# Altium PCB remote.PcbDoc (part 3 of 4)
Units mil, origin at the board's own origin, x right, y up, seen from the top; angles counter-clockwise.
Board outline 1653.54 x 3582.68 mil, 2 copper layers (Top Layer, Bottom Layer); 71 components, 53 nets, 248 pads, 250 vias.
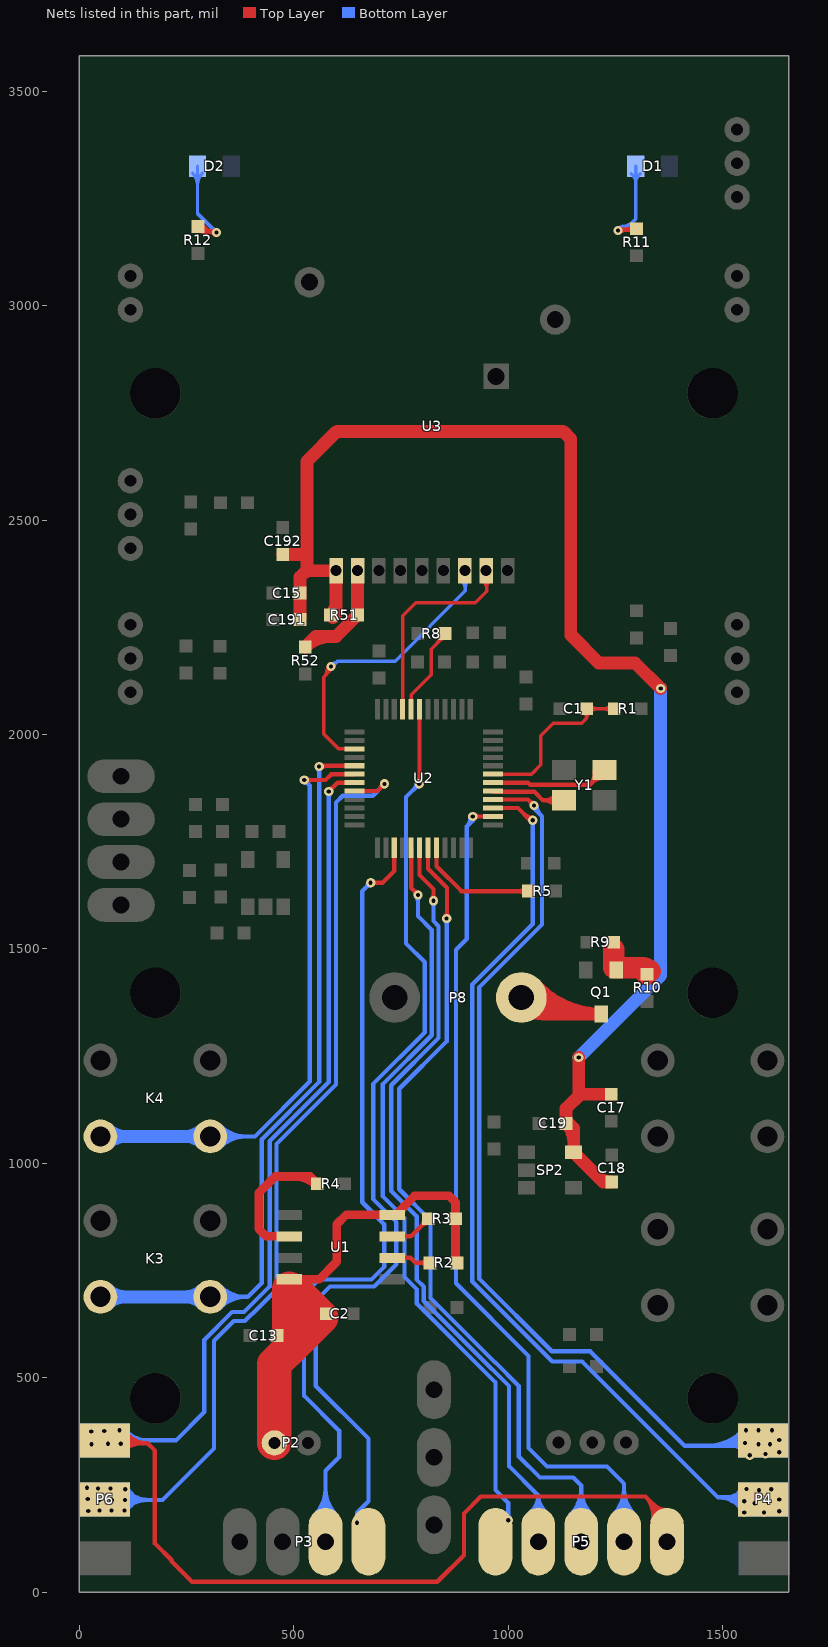
[diagram p3: the nets of this part, all layers, seen from the top]

## Via types
v1: diameter 21.65, hole 9.84, Top Layer to Bottom Layer, tented both sides, 241 vias
v2: diameter 21.65, hole 9.84, Top Layer to Bottom Layer, 9 vias

## Nets (pads, with @x,y where several pads share a name; then routed paths per layer and width w, separated by ;. In a path a pad name is that pad's centre, name@x,y a point inside that pad or via, vN(x,y) a via of type N, cw(c..) or ccw(c..) an arc to the next point about the centre after c; other vN are vias at no path point) (continued)
KEY-B1: P4.2 U2.3 | length 5449.9
  Top Layer w10: U2.3@964.57,1828.74 1022.64,1828.74 1051.18,1800.2 v1(1057.09,1800.2) ; 1037.06,1814.32 ccw(c1057.09,1834.35) 1057.09,1806.02 cw(c1057.09,1834.35) 1037.06,1814.32
  Bottom Layer w10: v1(1057.09,1800.2) 1057.09,1558.06 916.09,1417.06 916.09,724.76 1102.47,538.39 1172.24,538.39 1489.17,221.46 P4.2@1555.12,221.46 ; 1529.03,218.32 ccw(c1538.78,235.22) P4.2@1547.57,217.8 ; P4.2@1535.57,205.99 ccw(c1558.8,215.88) P4.2@1551.81,191.62 ; P4.2@1541.22,223.06 cw(c1560.71,214.68) P4.2@1556.32,235.44 ; P4.2@1542.71,235.51 ccw(c1542.71,242.13) P4.2@1549.31,241.61 ; P4.2@1547.6,225.2 ccw(c1538.99,233.55) P4.2@1549.85,238.66 ; P4.2@1553.99,208.17 cw(c1558.27,203.18) P4.2@1562.92,207.83 ; P4.2@1554.65,208.85 cw(c1560.36,204.05) P4.2@1564.33,210.35 ; v1(1555.12,241.14) P4.2@1569.88,241.14 ; P4.2@1558.53,236.42 cw(c1567.81,223.55) P4.2@1571.92,238.87 ; P4.2@1560.16,244.06 ccw(c1588.99,260.7) P4.2@1580.37,228.55 ; P4.2@1561.12,209.7 ccw(c1564.72,215.93) P4.2@1570.3,211.37 ; P4.2@1569.76,204.76 ccw(c1557.58,197.73) 1561.22,211.32 ccw(c1564.86,224.91) P4.2@1571.89,212.72 ; P4.2@1588.44,242.61 ccw(c1597.11,252.69) P4.2@1600.55,239.85 ; v1(1596.46,186.02) v1(1550.2,186.02) v1(1550.2,212.6) 1555.12,207.68 v1(1574.8,207.68) ; P4.2@1606.86,204.83 cw(c1608.17,191.15) P4.2@1620.08,198.02 ; P4.2@1611.68,234.53 cw(c1606.29,214.4) P4.2@1624.33,224.82 ; P4.2@1621.32,199.18 ccw(c1631.89,209.75) P4.2@1631.89,194.8 ; P4.2@1621.57,227.58 cw(c1610.53,216.55) P4.2@1626.14,216.55 ; P4.2@1622.2,198.3 cw(c1612.87,188.98) P4.2@1626.06,188.98 ; P4.2@1623.11,226.04 ccw(c1631.97,234.9) P4.2@1631.97,222.37 ; 1057.09,1786.13 cw(c1071.15,1786.13) 1061.21,1796.08 ccw(c1071.15,1786.13) 1057.09,1786.13 ; 1057.09,1786.13 ccw(c1043.02,1786.13) 1052.97,1796.08 cw(c1043.02,1786.13) 1057.09,1786.13 ; 1520.38,213.65 ccw(c1531.11,232.92) P4.2@1546.21,216.85 ; 1520.38,213.65 ccw(c1531.11,232.92) P4.2@1546.21,216.85 ; 1520.38,213.65 ccw(c1531.11,232.92) P4.2@1546.21,216.85 ; 1525.35,216.49 ccw(c1534.87,244.08) P4.2@1547.65,217.84 ; 1525.35,216.49 ccw(c1534.87,244.08) P4.2@1547.65,217.84 ; 1525.35,216.49 ccw(c1534.87,244.08) P4.2@1547.65,217.84 ; 1529.54,221.71 cw(c1531.49,208.53) P4.2@1544.5,211.36 ; 1529.54,221.71 cw(c1531.49,208.53) P4.2@1544.5,211.36 ; 1529.54,221.71 cw(c1531.49,208.53) P4.2@1544.5,211.36 ; 1531.5,207.08 cw(c1511.56,180.54) P4.2@1544.43,185.21 ; 1531.5,207.08 cw(c1511.56,180.54) P4.2@1544.43,185.21 ; 1531.5,207.08 cw(c1511.56,180.54) P4.2@1544.43,185.21 ; 1532.33,207 ccw(c1540.94,222.45) P4.2@1553.05,209.56 ; 1532.33,207 ccw(c1540.94,222.45) P4.2@1553.05,209.56 ; 1532.33,207 ccw(c1540.94,222.45) P4.2@1553.05,209.56 ; 1534.92,220.69 ccw(c1520.19,246.21) P4.2@1549.35,241.98 ; 1534.92,220.69 ccw(c1520.19,246.21) P4.2@1549.35,241.98 ; 1534.92,220.69 ccw(c1520.19,246.21) P4.2@1549.35,241.98 ; P4.2@1537.63,233.41 cw(c1548.16,215.18) P4.2@1553.61,235.51 ; P4.2@1537.63,233.41 cw(c1548.16,215.18) P4.2@1553.61,235.51 ; P4.2@1537.63,233.41 cw(c1548.16,215.18) P4.2@1553.61,235.51 ; P4.2@1540.14,223.27 cw(c1541.97,210.81) P4.2@1554.27,213.49 ; P4.2@1540.14,223.27 cw(c1541.97,210.81) P4.2@1554.27,213.49 ; P4.2@1540.14,223.27 cw(c1541.97,210.81) P4.2@1554.27,213.49 ; P4.2@1544.28,200.34 ccw(c1550.77,211.99) P4.2@1559.9,202.27 ; P4.2@1544.28,200.34 ccw(c1550.77,211.99) P4.2@1559.9,202.27 ; P4.2@1544.28,200.34 ccw(c1550.77,211.99) P4.2@1559.9,202.27 ; P4.2@1546.08,208.48 ccw(c1514.74,177.15) 1514.74,221.46 cw(c1514.74,177.15) P4.2@1546.08,208.48 ; P4.2@1546.08,208.48 cw(c1536.13,198.53) P4.2@1550.2,198.53 ; P4.2@1546.08,208.48 cw(c1536.13,198.53) P4.2@1550.2,198.53 ; P4.2@1546.25,211.24 cw(c1562.37,216.78) P4.2@1553.62,231.41 ; P4.2@1546.25,211.24 cw(c1562.37,216.78) P4.2@1553.62,231.41 ; P4.2@1546.25,211.24 cw(c1562.37,216.78) P4.2@1553.62,231.41 ; P4.2@1550.2,198.53 cw(c1564.26,198.53) 1554.32,208.48 ccw(c1564.26,198.53) P4.2@1550.2,198.53 ; P4.2@1550.2,200.09 cw(c1536.13,200.09) 1546.08,190.14 ccw(c1536.13,200.09) P4.2@1550.2,200.09 ; P4.2@1550.2,200.09 ccw(c1564.26,200.09) P4.2@1554.32,190.14 ; P4.2@1550.2,200.09 ccw(c1564.26,200.09) P4.2@1554.32,190.14 ; P4.2@1553.67,207.92 cw(c1558.3,201.66) P4.2@1563.08,207.81 ; P4.2@1553.67,207.92 cw(c1558.3,201.66) P4.2@1563.08,207.81 ; P4.2@1553.67,207.92 cw(c1558.3,201.66) P4.2@1563.08,207.81 ; P4.2@1554.32,190.14 ccw(c1564.26,200.09) P4.2@1564.26,186.02 ; P4.2@1554.32,190.14 ccw(c1564.26,200.09) P4.2@1564.26,186.02 ; P4.2@1555.21,209.63 ccw(c1561.59,205.86) P4.2@1556.47,200.5 ; P4.2@1555.21,209.63 ccw(c1561.59,205.86) P4.2@1556.47,200.5 ; P4.2@1555.21,209.63 ccw(c1561.59,205.86) P4.2@1556.47,200.5 ; P4.2@1555.24,215.51 ccw(c1573.42,226) P4.2@1567.98,205.74 ; P4.2@1555.24,215.51 ccw(c1573.42,226) P4.2@1567.98,205.74 ; P4.2@1555.24,215.51 ccw(c1573.42,226) P4.2@1567.98,205.74 ; P4.2@1559.24,237.02 cw(c1569.19,227.07) P4.2@1569.19,241.14 ; P4.2@1559.24,237.02 cw(c1569.19,227.07) P4.2@1569.19,241.14 ; P4.2@1559.24,237.02 cw(c1569.19,227.07) P4.2@1569.19,241.14 ; P4.2@1559.24,237.02 cw(c1569.19,227.07) P4.2@1569.19,241.14 ; P4.2@1559.24,237.02 cw(c1569.19,227.07) P4.2@1569.19,241.14 ; P4.2@1559.24,237.02 cw(c1569.19,227.07) P4.2@1569.19,241.14 ; P4.2@1559.24,245.26 ccw(c1569.19,255.21) P4.2@1569.19,241.14 ; P4.2@1559.24,245.26 ccw(c1569.19,255.21) P4.2@1569.19,241.14 ; P4.2@1559.24,245.26 ccw(c1569.19,255.21) P4.2@1569.19,241.14 ; P4.2@1559.24,245.26 ccw(c1569.19,255.21) P4.2@1569.19,241.14 ; P4.2@1559.24,245.26 ccw(c1569.19,255.21) P4.2@1569.19,241.14 ; P4.2@1559.24,245.26 ccw(c1569.19,255.21) P4.2@1569.19,241.14 ; P4.2@1560.74,207.68 cw(c1560.74,193.61) 1570.68,203.56 ccw(c1560.74,193.61) P4.2@1560.74,207.68 ; P4.2@1560.74,207.68 ccw(c1560.74,221.74) 1570.68,211.8 cw(c1560.74,221.74) P4.2@1560.74,207.68 ; P4.2@1564.26,186.02 ccw(c1564.26,171.96) 1554.32,181.9 cw(c1564.26,171.96) P4.2@1564.26,186.02 ; P4.2@1569.88,241.14 cw(c1569.88,230.17) P4.2@1579.53,235.41 ; P4.2@1569.88,241.14 cw(c1569.88,230.17) P4.2@1579.53,235.41 ; P4.2@1569.88,241.14 cw(c1569.88,230.17) P4.2@1579.53,235.41 ; P4.2@1569.88,241.14 cw(c1569.88,230.17) P4.2@1579.53,235.41 ; P4.2@1569.88,241.14 P4.2@1594.49,216.54 ; P4.2@1569.88,241.14 1581.69,241.14 v1(1584.65,238.19) 1611.22,238.19 v1(1613.19,240.16) 1631.97,221.38 v1(1631.97,216.55) 1631.97,189.06 v1(1631.89,188.98) 1627.95,188.98 v1(1606.3,210.63) 1603.35,207.68 v1(1574.8,207.68) ; v1(1574.8,207.68) cw(c1574.8,235.39) 1554.47,216.56 ccw(c1574.8,235.39) v1(1574.8,207.68) ; P4.2@1578.22,212.39 ccw(c1588.28,226.27) P4.2@1592.72,209.72 ; P4.2@1578.22,212.39 ccw(c1588.28,226.27) P4.2@1592.72,209.72 ; P4.2@1578.22,212.39 ccw(c1588.28,226.27) P4.2@1592.72,209.72 ; P4.2@1581.06,240.32 ccw(c1590.88,234.48) P4.2@1584.13,225.26 ; P4.2@1581.06,240.32 ccw(c1590.88,234.48) P4.2@1584.13,225.26 ; P4.2@1581.06,240.32 ccw(c1590.88,234.48) P4.2@1584.13,225.26 ; P4.2@1582.39,186.02 cw(c1582.39,171.96) 1592.34,181.9 ccw(c1582.39,171.96) P4.2@1582.39,186.02 ; P4.2@1582.39,186.02 ccw(c1582.39,200.09) 1592.34,190.14 cw(c1582.39,200.09) P4.2@1582.39,186.02 ; P4.2@1588.87,207.68 cw(c1588.87,221.74) 1578.92,211.8 ccw(c1588.87,221.74) P4.2@1588.87,207.68 ; P4.2@1588.87,207.68 ccw(c1588.87,193.61) 1578.92,203.56 cw(c1588.87,193.61) P4.2@1588.87,207.68 ; P4.2@1589.65,235.21 ccw(c1600.39,228.82) P4.2@1593,218.75 ; P4.2@1589.65,235.21 ccw(c1600.39,228.82) P4.2@1593,218.75 ; P4.2@1589.65,235.21 ccw(c1600.39,228.82) P4.2@1593,218.75 ; P4.2@1594.49,216.54 ccw(c1599.45,221.5) 1603.19,215.56 cw(c1599.45,221.5) P4.2@1594.49,216.54 ; P4.2@1594.49,216.54 cw(c1607.75,229.8) 1590.12,236.2 ccw(c1607.75,229.8) P4.2@1594.49,216.54 ; P4.2@1598.71,238.19 cw(c1598.71,252.26) 1588.77,242.31 ccw(c1598.71,252.26) P4.2@1598.71,238.19 ; P4.2@1598.71,238.19 ccw(c1598.71,224.12) 1588.77,234.07 cw(c1598.71,224.12) P4.2@1598.71,238.19 ; P4.2@1611.93,212.14 ccw(c1636.29,218.66) P4.2@1623.68,196.83 ; P4.2@1611.93,212.14 ccw(c1636.29,218.66) P4.2@1623.68,196.83 ; P4.2@1611.93,212.14 ccw(c1636.29,218.66) P4.2@1623.68,196.83 ; P4.2@1616.25,200.68 cw(c1626.19,210.63) 1612.13,210.63 ccw(c1626.19,210.63) P4.2@1616.25,200.68 ; P4.2@1616.25,200.68 ccw(c1606.3,190.74) 1606.3,204.8 cw(c1606.3,190.74) P4.2@1616.25,200.68 ; P4.2@1623.14,230.21 cw(c1633.08,240.16) 1619.02,240.16 ccw(c1633.08,240.16) P4.2@1623.14,230.21 ; P4.2@1623.14,230.21 ccw(c1613.19,220.26) 1613.19,234.33 cw(c1613.19,220.26) P4.2@1623.14,230.21 ; P4.2@1626.14,216.55 ccw(c1600.41,216.55) 1618.61,234.74 cw(c1600.41,216.55) P4.2@1626.14,216.55 ; P4.2@1631.89,194.8 cw(c1631.89,218.38) 1615.22,201.71 ccw(c1631.89,218.38) P4.2@1631.89,194.8 ; P4.2@1631.97,202.48 cw(c1646.04,202.48) 1636.09,212.43 ccw(c1646.04,202.48) P4.2@1631.97,202.48 ; P4.2@1631.97,202.48 ccw(c1617.9,202.48) 1627.85,212.43 cw(c1617.9,202.48) P4.2@1631.97,202.48 ; 1489.18,221.46 cw(c1489.18,142.88) 1548.75,194.12 ccw(c1489.18,142.88) 1489.18,221.46 ; 1503.71,221.46 ccw(c1503.71,287.63) 1550.5,240.84 cw(c1503.71,287.63) 1503.71,221.46 ; 1510.97,221.46 cw(c1510.97,161.63) 1556.33,200.64 ccw(c1510.97,161.63) 1510.97,221.46 ; 1527.85,221.46 ccw(c1527.85,263.49) 1557.57,233.77 cw(c1527.85,263.49) 1527.85,221.46 ; 1532.76,221.46 cw(c1532.76,180.37) 1563.91,207.16 ccw(c1532.76,180.37) 1532.76,221.46 ; P4.2@1538.89,221.46 cw(c1538.89,201.29) 1553.15,215.55 ccw(c1538.89,201.29) P4.2@1538.89,221.46 ; P4.2@1555.12,235.31 cw(c1555.12,185.6) 1590.27,220.75 ccw(c1555.12,185.6) P4.2@1555.12,235.31 ; P4.2@1555.12,245.31 cw(c1555.12,219.74) 1573.2,237.83 ccw(c1555.12,219.74) P4.2@1555.12,245.31 ; P4.2@1563.45,241.14 cw(c1563.45,216.99) 1580.53,234.07 ccw(c1563.45,216.99) P4.2@1563.45,241.14 ; P4.2@1585.1,207.68 ccw(c1585.1,231.83) 1602.18,214.75 cw(c1585.1,231.83) P4.2@1585.1,207.68 ; P4.2@1586.27,224.75 ccw(c1606.3,244.78) 1606.3,216.46 cw(c1606.3,244.78) P4.2@1586.27,224.75 ; P4.2@1594.37,238.19 ccw(c1594.37,258.98) 1609.07,244.28 cw(c1594.37,258.98) P4.2@1594.37,238.19 ; P4.2@1627.77,193.1 ccw(c1617.63,203.24) 1631.97,203.24 cw(c1617.63,203.24) P4.2@1627.77,193.1 ; P4.2@1631.97,202.85 ccw(c1645.76,202.85) 1636.01,193.1 cw(c1645.76,202.85) P4.2@1631.97,202.85
KEY-B2: P4.3 U2.4 | length 5111
  Top Layer w10: U2.4@964.57,1848.43 1046.26,1848.43 v1(1060.04,1834.65) ; 1050.09,1844.59 cw(c1040.15,1834.65) 1054.21,1834.65 ccw(c1040.15,1834.65) 1050.09,1844.59 ; 1050.09,1844.59 ccw(c1060.04,1854.54) 1060.04,1840.47 cw(c1060.04,1854.54) 1050.09,1844.59
  Bottom Layer w10: v1(1060.04,1834.65) 1060.04,1828.11 1078.91,1809.24 1078.91,1557.26 932.09,1410.43 932.09,731.39 1101.47,562.01 1190.94,562.01 1411.42,341.54 1545.28,341.54 v1(1552.17,348.43) P4.3@1555.12,345.47 ; 1534.01,344.44 cw(c1540.81,332.66) P4.3@1548.76,343.7 ; P4.3@1537.88,356.68 cw(c1564.83,343.98) P4.3@1555.88,372.39 ; P4.3@1537.96,343.73 cw(c1543.33,337.42) P4.3@1548.52,343.88 ; P4.3@1551.31,342.66 cw(c1549.5,330.39) P4.3@1560.25,336.59 ; P4.3@1557.79,346.92 ccw(c1567.82,344.23) P4.3@1558.83,339.04 ; v1(1562.99,319.88) 1596.46,319.88 v1(1599.41,322.83) P4.3@1577.76,322.83 ; P4.3@1594.49,354.33 1577.76,354.33 v1(1554.13,377.95) v1(1583.66,377.95) v1(1615.16,377.95) P4.3@1631.97,361.14 ; P4.3@1613.65,372.32 cw(c1609.12,355.41) P4.3@1624.28,364.16 ; P4.3@1616.06,345.47 ccw(c1632.39,345.47) P4.3@1620.85,333.92 ; P4.3@1618.58,336.19 ccw(c1610.24,327.84) P4.3@1610.24,339.65 ; P4.3@1618.95,338.09 ccw(c1628.9,343.83) P4.3@1630.94,332.52 ; P4.3@1620.79,376.44 ccw(c1631.04,373.7) P4.3@1621.85,368.39 ; P4.3@1621.21,367.24 cw(c1609.31,355.33) P4.3@1626.14,355.33 ; P4.3@1623.98,364.47 ccw(c1631.97,372.46) P4.3@1631.97,361.16 ; 1524.45,350.58 cw(c1532.47,333.45) P4.3@1547.53,344.9 ; 1524.45,350.58 cw(c1532.47,333.45) P4.3@1547.53,344.9 ; 1524.45,350.58 cw(c1532.47,333.45) P4.3@1547.53,344.9 ; 1525.38,345.67 cw(c1534.52,315.47) P4.3@1549.42,343.29 ; 1525.38,345.67 cw(c1534.52,315.47) P4.3@1549.42,343.29 ; 1525.38,345.67 cw(c1534.52,315.47) P4.3@1549.42,343.29 ; 1530.9,341.08 ccw(c1526.28,366.29) P4.3@1547.37,351.73 ; 1530.9,341.08 ccw(c1526.28,366.29) P4.3@1547.37,351.73 ; 1530.9,341.08 ccw(c1526.28,366.29) P4.3@1547.37,351.73 ; 1532.39,354.09 ccw(c1510.34,385.87) P4.3@1548.4,378.99 ; 1532.39,354.09 ccw(c1510.34,385.87) P4.3@1548.4,378.99 ; 1532.39,354.09 ccw(c1510.34,385.87) P4.3@1548.4,378.99 ; P4.3@1535.67,355.83 cw(c1542.56,341.12) P4.3@1555.49,350.95 ; P4.3@1535.67,355.83 cw(c1542.56,341.12) P4.3@1555.49,350.95 ; P4.3@1535.67,355.83 cw(c1542.56,341.12) P4.3@1555.49,350.95 ; P4.3@1535.92,368.06 cw(c1549.57,349.25) P4.3@1553.22,372.2 ; P4.3@1535.92,368.06 cw(c1549.57,349.25) P4.3@1553.22,372.2 ; P4.3@1535.92,368.06 cw(c1549.57,349.25) P4.3@1553.22,372.2 ; P4.3@1548.76,346.01 cw(c1561.17,354.83) P4.3@1551.51,366.59 ; P4.3@1548.76,346.01 cw(c1561.17,354.83) P4.3@1551.51,366.59 ; P4.3@1548.76,346.01 cw(c1561.17,354.83) P4.3@1551.51,366.59 ; P4.3@1553.69,354.05 ccw(c1559.18,374.26) P4.3@1570.56,356.67 ; P4.3@1553.69,354.05 ccw(c1559.18,374.26) P4.3@1570.56,356.67 ; P4.3@1553.69,354.05 ccw(c1559.18,374.26) P4.3@1570.56,356.67 ; P4.3@1555.12,345.47 cw(c1541.96,332.32) 1557.98,322.85 ccw(c1541.96,332.32) P4.3@1555.12,345.47 ; P4.3@1555.12,345.47 v1(1583.66,345.47) v1(1610.24,345.47) 1613.28,345.47 v1(1631.97,326.79) v1(1631.97,355.33) P4.3@1631.97,361.14 ; P4.3@1555.12,345.47 P4.3@1577.76,322.83 ; P4.3@1556.91,351.8 cw(c1569.92,361.05) P4.3@1559.8,373.39 ; P4.3@1556.91,351.8 cw(c1569.92,361.05) P4.3@1559.8,373.39 ; P4.3@1556.91,351.8 cw(c1569.92,361.05) P4.3@1559.8,373.39 ; P4.3@1557.99,348.68 cw(c1577.93,349.55) P4.3@1565.54,365.2 ; P4.3@1557.99,348.68 cw(c1577.93,349.55) P4.3@1565.54,365.2 ; P4.3@1557.99,348.68 cw(c1577.93,349.55) P4.3@1565.54,365.2 ; P4.3@1562.11,338.48 cw(c1572.06,348.43) 1557.99,348.43 ccw(c1572.06,348.43) P4.3@1562.11,338.48 ; P4.3@1562.11,338.48 ccw(c1552.17,328.53) 1552.17,342.6 cw(c1552.17,328.53) P4.3@1562.11,338.48 ; P4.3@1564.08,368.01 cw(c1574.03,377.95) 1559.96,377.95 ccw(c1574.03,377.95) P4.3@1564.08,368.01 ; P4.3@1564.08,368.01 ccw(c1554.13,358.06) 1554.13,372.13 cw(c1554.13,358.06) P4.3@1564.08,368.01 ; P4.3@1565.75,347.51 ccw(c1570.18,364.07) P4.3@1580.24,350.19 ; P4.3@1565.75,347.51 ccw(c1570.18,364.07) P4.3@1580.24,350.19 ; P4.3@1565.75,347.51 ccw(c1570.18,364.07) P4.3@1580.24,350.19 ; P4.3@1567.11,315.76 cw(c1577.06,305.81) P4.3@1577.06,319.88 ; P4.3@1567.11,315.76 cw(c1584.19,298.69) 1584.19,322.83 ccw(c1584.19,298.69) P4.3@1567.11,315.76 ; P4.3@1567.11,315.76 cw(c1577.06,305.81) P4.3@1577.06,319.88 ; P4.3@1568.2,377.95 cw(c1568.2,392.02) 1558.25,382.07 ccw(c1568.2,392.02) P4.3@1568.2,377.95 ; P4.3@1568.2,377.95 ccw(c1568.2,363.89) 1558.25,373.83 cw(c1568.2,363.89) P4.3@1568.2,377.95 ; P4.3@1569.59,345.47 cw(c1569.59,331.41) 1579.54,341.35 ccw(c1569.59,331.41) P4.3@1569.59,345.47 ; P4.3@1569.59,345.47 ccw(c1569.59,359.54) 1579.54,349.59 cw(c1569.59,359.54) P4.3@1569.59,345.47 ; P4.3@1569.59,377.95 cw(c1569.59,363.89) 1579.54,373.83 ccw(c1569.59,363.89) P4.3@1569.59,377.95 ; P4.3@1569.59,377.95 ccw(c1569.59,392.02) 1579.54,382.07 cw(c1569.59,392.02) P4.3@1569.59,377.95 ; P4.3@1577.06,319.88 cw(c1577.06,333.95) 1567.11,324 ccw(c1577.06,333.95) P4.3@1577.06,319.88 ; P4.3@1577.76,322.83 ccw(c1577.76,311.86) 1568.11,317.1 cw(c1577.76,311.86) P4.3@1577.76,322.83 ; P4.3@1585.34,322.83 cw(c1585.34,308.77) 1595.29,318.71 ccw(c1585.34,308.77) P4.3@1585.34,322.83 ; P4.3@1585.34,322.83 ccw(c1585.34,336.9) P4.3@1595.29,326.95 ; P4.3@1585.34,322.83 ccw(c1585.34,336.9) P4.3@1595.29,326.95 ; P4.3@1595.29,326.95 cw(c1578.21,344.03) 1578.21,319.88 ccw(c1578.21,344.03) P4.3@1595.29,326.95 ; P4.3@1596.17,345.47 cw(c1596.17,331.41) 1606.12,341.35 ccw(c1596.17,331.41) P4.3@1596.17,345.47 ; P4.3@1596.17,345.47 ccw(c1596.17,359.54) 1606.12,349.59 cw(c1596.17,359.54) P4.3@1596.17,345.47 ; P4.3@1597.73,345.47 cw(c1597.73,359.54) 1587.78,349.59 ccw(c1597.73,359.54) P4.3@1597.73,345.47 ; P4.3@1597.73,345.47 ccw(c1597.73,331.41) 1587.78,341.35 cw(c1597.73,331.41) P4.3@1597.73,345.47 ; P4.3@1597.73,377.95 cw(c1597.73,392.02) 1587.78,382.07 ccw(c1597.73,392.02) P4.3@1597.73,377.95 ; P4.3@1597.73,377.95 ccw(c1597.73,363.89) 1587.78,373.83 cw(c1597.73,363.89) P4.3@1597.73,377.95 ; P4.3@1601.09,377.95 cw(c1601.09,363.89) 1611.04,373.83 ccw(c1601.09,363.89) P4.3@1601.09,377.95 ; P4.3@1601.09,377.95 ccw(c1601.09,392.02) 1611.04,382.07 cw(c1601.09,392.02) P4.3@1601.09,377.95 ; P4.3@1610.24,339.65 cw(c1610.24,318.22) 1625.39,333.37 ccw(c1610.24,318.22) P4.3@1610.24,339.65 ; P4.3@1615.95,338.82 cw(c1604.81,319.51) P4.3@1626.34,325.28 ; P4.3@1615.95,338.82 cw(c1604.81,319.51) P4.3@1626.34,325.28 ; P4.3@1615.95,338.82 cw(c1604.81,319.51) P4.3@1626.34,325.28 ; P4.3@1622.02,336.73 cw(c1612.08,326.79) 1626.14,326.79 ccw(c1612.08,326.79) P4.3@1622.02,336.73 ; P4.3@1622.02,336.73 ccw(c1631.97,346.68) 1631.97,332.61 cw(c1631.97,346.68) P4.3@1622.02,336.73 ; P4.3@1625.1,368.01 cw(c1635.05,377.95) 1620.98,377.95 ccw(c1635.05,377.95) P4.3@1625.1,368.01 ; P4.3@1625.1,368.01 ccw(c1615.16,358.06) 1615.16,372.13 cw(c1615.16,358.06) P4.3@1625.1,368.01 ; P4.3@1626.14,355.33 ccw(c1598.05,355.33) 1617.92,375.2 cw(c1598.05,355.33) P4.3@1626.14,355.33 ; P4.3@1631.97,340.85 cw(c1617.9,340.85) 1627.85,330.91 ccw(c1617.9,340.85) P4.3@1631.97,340.85 ; P4.3@1631.97,340.85 ccw(c1646.04,340.85) 1636.09,330.91 cw(c1646.04,340.85) P4.3@1631.97,340.85 ; P4.3@1631.97,341.27 cw(c1646.04,341.27) 1636.09,351.21 ccw(c1646.04,341.27) P4.3@1631.97,341.27 ; P4.3@1631.97,341.27 ccw(c1617.9,341.27) 1627.85,351.21 cw(c1617.9,341.27) P4.3@1631.97,341.27 ; v1@1065.87,1834.65 ccw(c1095.71,1834.65) 1074.61,1813.54 cw(c1095.71,1834.65) v1@1065.87,1834.65 ; 1460.94,341.54 ccw(c1460.94,468.2) 1550.5,378.63 cw(c1460.94,468.2) 1460.94,341.54 ; 1485.08,341.54 ccw(c1485.08,444.06) 1557.57,371.56 cw(c1485.08,444.06) 1485.08,341.54 ; 1509.22,341.54 ccw(c1509.22,419.91) 1564.64,364.49 cw(c1509.22,419.91) 1509.22,341.54 ; 1521.47,341.54 ccw(c1521.47,379.13) 1548.05,352.55 cw(c1521.47,379.13) 1521.47,341.54 ; 1522.72,341.54 cw(c1522.72,302.24) 1550.5,330.03 ccw(c1522.72,302.24) 1522.72,341.54 ; 1533.36,341.54 ccw(c1533.36,395.77) 1571.71,357.42 cw(c1533.36,395.77) 1533.36,341.54 ; P4.3@1556.29,352.55 ccw(c1573.36,369.62) 1573.36,345.47 cw(c1573.36,369.62) P4.3@1556.29,352.55 ; P4.3@1564.23,336.36 cw(c1553.42,325.54) 1566.58,317.76 ccw(c1553.42,325.54) P4.3@1564.23,336.36 ; P4.3@1571.63,360.46 cw(c1556.64,345.47) 1577.83,345.47 ccw(c1556.64,345.47) P4.3@1571.63,360.46
KEY-B3: P6.2 U2.32 | length 3801
  Top Layer w10: U2.32@641.73,1868.11 694.88,1868.11 v1(711.61,1884.84) ; 701.67,1874.9 cw(c711.61,1864.95) 711.61,1879.02 ccw(c711.61,1864.95) 701.67,1874.9 ; 701.67,1874.9 ccw(c691.72,1884.84) 705.79,1884.84 cw(c691.72,1884.84) 701.67,1874.9
  Bottom Layer w10: P6.2@53.07,215.55 cw(c64.08,215.55) P6.2@56.3,223.34 ; P6.2@53.06,220.1 ccw(c39.03,244.39) P6.2@67.02,242.52 ; P6.2@59.35,226.39 cw(c47.24,238.5) P6.2@47.24,221.38 ; P6.2@69.29,229.47 ccw(c61.54,242.88) P6.2@77,241.85 ; P6.2@69.55,227.81 cw(c65.3,222.53) P6.2@70.94,218.78 ; P6.2@102.81,236.42 cw(c93.56,228.68) P6.2@105.21,225.56 ; P6.2@105.21,226.99 cw(c94.86,226.99) P6.2@102.18,219.67 ; P6.2@105.21,231.8 ccw(c121.94,231.8) P6.2@110.34,219.75 ; P6.2@106.44,196.66 ccw(c108.59,207.55) 118.2,202 ; P6.2@106.53,228.74 cw(c111.46,230.06) P6.2@109.51,234.77 ; v1(107.28,240.16) 106.3,239.17 v1(106.3,215.55) 193.9,215.55 313.98,335.63 313.98,586.61 360.24,632.87 385.83,632.87 402.07,649.11 403.05,649.11 459.65,705.71 459.65,1045.28 598.43,1184.06 598.43,1841.54 614.17,1857.28 684.06,1857.28 v1(711.61,1884.84) ; P6.2@47.24,221.38 ccw(c47.24,261.58) 75.67,233.15 cw(c47.24,261.58) P6.2@47.24,221.38 ; P6.2@59.06,216.54 ccw(c38.84,236.75) 67.08,241.22 cw(c38.84,236.75) P6.2@59.06,216.54 ; P6.2@59.06,216.54 P6.2@81.69,239.17 ; P6.2@65.38,227.05 ccw(c80.1,225.28) P6.2@74.1,211.73 ; P6.2@65.38,227.05 ccw(c80.1,225.28) P6.2@74.1,211.73 ; P6.2@65.38,227.05 ccw(c80.1,225.28) P6.2@74.1,211.73 ; P6.2@66.99,240.48 ccw(c85.82,238.22) P6.2@78.15,220.88 ; P6.2@66.99,240.48 ccw(c85.82,238.22) P6.2@78.15,220.88 ; P6.2@66.99,240.48 ccw(c85.82,238.22) P6.2@78.15,220.88 ; P6.2@81.69,239.17 ccw(c92.46,228.41) 80.4,219.11 cw(c92.46,228.41) P6.2@81.69,239.17 ; P6.2@93.87,235.32 cw(c83.27,220.98) P6.2@100.63,216.89 ; P6.2@93.87,235.32 cw(c83.27,220.98) P6.2@100.63,216.89 ; P6.2@93.87,235.32 cw(c83.27,220.98) P6.2@100.63,216.89 ; P6.2@94.23,198.02 ccw(c84.51,211.22) P6.2@100.58,214.41 ; P6.2@94.23,198.02 ccw(c84.51,211.22) P6.2@100.58,214.41 ; P6.2@94.23,198.02 ccw(c84.51,211.22) P6.2@100.58,214.41 ; P6.2@101.14,191.06 cw(c121.52,190.52) P6.2@111.33,208.17 ; P6.2@101.14,191.06 cw(c121.52,190.52) P6.2@111.33,208.17 ; P6.2@101.14,191.06 cw(c121.52,190.52) P6.2@111.33,208.17 ; P6.2@102.18,219.67 ccw(c92.23,229.62) P6.2@106.3,229.62 ; P6.2@102.18,219.67 ccw(c92.23,229.62) P6.2@106.3,229.62 ; P6.2@103.24,239.13 ccw(c128.37,245.5) P6.2@116.9,222.25 ; P6.2@103.24,239.13 ccw(c128.37,245.5) P6.2@116.9,222.25 ; P6.2@103.24,239.13 ccw(c128.37,245.5) P6.2@116.9,222.25 ; P6.2@106.3,229.62 ccw(c120.37,229.62) P6.2@110.42,219.67 ; P6.2@106.3,229.62 ccw(c120.37,229.62) P6.2@110.42,219.67 ; P6.2@107.69,228.89 ccw(c116.57,226.51) P6.2@110.28,219.8 ; P6.2@107.69,228.89 ccw(c116.57,226.51) P6.2@110.28,219.8 ; P6.2@107.69,228.89 ccw(c116.57,226.51) P6.2@110.28,219.8 ; P6.2@110.42,219.67 ccw(c120.37,229.62) 120.37,215.55 ; P6.2@110.42,219.67 ccw(c120.37,229.62) 120.37,215.55 ; P6.2@110.94,189.44 cw(c131.95,183.81) 121.08,202.64 ; P6.2@110.94,189.44 cw(c131.95,183.81) 121.08,202.64 ; P6.2@110.94,189.44 cw(c131.95,183.81) 121.08,202.64 ; P6.2@111.52,212.97 cw(c122.21,207.68) 125.08,219.25 ; P6.2@111.52,212.97 cw(c122.21,207.68) 125.08,219.25 ; P6.2@111.52,212.97 cw(c122.21,207.68) 125.08,219.25 ; P6.2@111.67,217.8 ccw(c120.19,221.36) 122.41,212.4 ; P6.2@111.67,217.8 ccw(c120.19,221.36) 122.41,212.4 ; P6.2@111.67,217.8 ccw(c120.19,221.36) 122.41,212.4 ; P6.2@112.91,241.67 ccw(c131.55,246.66) 121.9,229.95 ; P6.2@112.91,241.67 ccw(c131.55,246.66) 121.9,229.95 ; P6.2@112.91,241.67 ccw(c131.55,246.66) 121.9,229.95 ; 120.37,215.55 ccw(c120.37,201.48) 110.42,211.43 cw(c120.37,201.48) 120.37,215.55 ; 701.67,1874.9 cw(c711.61,1864.95) 711.61,1879.02 ccw(c711.61,1864.95) 701.67,1874.9 ; 701.67,1874.9 ccw(c691.72,1884.84) 705.79,1884.84 cw(c691.72,1884.84) 701.67,1874.9 ; P6.2@47.24,211.38 ccw(c47.24,227.44) 58.6,216.08 cw(c47.24,227.44) P6.2@47.24,211.38 ; P6.2@72.48,213 cw(c83.37,221.4) 73.65,231.13 ccw(c83.37,221.4) P6.2@72.48,213 ; P6.2@72.94,230.42 ccw(c62.82,240.54) 76.96,242.78 cw(c62.82,240.54) P6.2@72.94,230.42 ; P6.2@95.97,199.3 cw(c135.2,160.08) 135.2,215.55 ccw(c135.2,160.08) P6.2@95.97,199.3 ; P6.2@95.97,233.77 ccw(c139.95,277.75) 139.95,215.55 cw(c139.95,277.75) P6.2@95.97,233.77 ; P6.2@103.04,192.23 cw(c159.34,135.94) 159.34,215.55 ccw(c159.34,135.94) P6.2@103.04,192.23 ; P6.2@103.04,240.84 ccw(c164.09,301.89) 164.09,215.55 cw(c164.09,301.89) P6.2@103.04,240.84 ; P6.2@103.16,236.04 cw(c95.59,228.47) 106.3,228.47 ccw(c95.59,228.47) P6.2@103.16,236.04 ; P6.2@106.3,223.71 cw(c123.73,223.71) 111.4,236.04 ccw(c123.73,223.71) P6.2@106.3,223.71
  other v1: 20.67,189.96 47.24,190.94 74.8,190.94 105.32,190.94 47.24,215.55 75.79,215.55 19.69,217.52 43.31,242.13 72.83,242.13 17.72,244.09
KEY-B4: P5.5 P6.3 U2.31 | length 6261.7
  Top Layer w10: P6.3@96.46,347.44 159.45,347.44 ; v1(581.69,1867.13) 602.36,1887.8 U2.31@641.73,1887.8 ; P5.5@1370.08,118.11 1349.41,138.78 1349.41,193.9 ; P6.3@89.98,363.13 cw(c82.83,355.44) P6.3@91.59,349.66 ; P6.3@89.98,363.13 cw(c82.83,355.44) P6.3@91.59,349.66 ; P6.3@89.98,363.13 cw(c82.83,355.44) P6.3@91.59,349.66 ; P6.3@99.3,378.55 ccw(c127.22,381.4) P6.3@109.5,359.64 ; P6.3@99.3,378.55 ccw(c127.22,381.4) P6.3@109.5,359.64 ; P6.3@99.3,378.55 ccw(c127.22,381.4) P6.3@109.5,359.64 ; 159.45,347.44 cw(c159.45,412.63) 106.6,374.46 ccw(c159.45,412.63) 159.45,347.44 ; 159.45,347.44 176.18,330.71 176.18,114.17 215.55,74.8 215.55,71.85 262.8,24.61 834.65,24.61 896.65,86.61 896.65,184.06 936.02,223.43 1319.88,223.43 ; 591.64,1877.07 cw(c581.69,1887.02) 581.69,1872.95 ccw(c581.69,1887.02) 591.64,1877.07 ; 591.64,1877.07 ccw(c601.59,1867.13) 587.52,1867.13 cw(c601.59,1867.13) 591.64,1877.07 ; 1319.88,223.42 cw(c1275.7,179.24) 1336.59,165.2 ccw(c1275.7,179.24) 1319.88,223.42 ; 1319.88,223.43 1349.41,193.9 ; 1349.41,193.9 ccw(c1358.12,202.6) 1361.27,190.7 cw(c1358.12,202.6) 1349.41,193.9 ; P6.3@90.39,362.75 ccw(c120.33,384.37) 120.33,347.44 cw(c120.33,384.37) P6.3@90.39,362.75 ; P6.3@95.97,337.1 cw(c120.94,312.13) 120.94,347.44 ccw(c120.94,312.13) P6.3@95.97,337.1 ; P6.3@98.49,368.6 ccw(c139.89,398.5) 139.89,347.44 cw(c139.89,398.5) P6.3@98.49,368.6 ; P6.3@100.58,342.34 cw(c112.9,330.01) 112.9,347.44 ccw(c112.9,330.01) P6.3@100.58,342.34 ; P6.3@100.58,350.58 ccw(c108.15,358.15) 108.15,347.44 cw(c108.15,358.15) P6.3@100.58,350.58 ; P6.3@103.04,330.03 cw(c145.08,287.99) 145.08,347.44 ccw(c145.08,287.99) P6.3@103.04,330.03 ; 1332.64,210.66 cw(c1296.44,174.46) 1346.33,162.96 ccw(c1296.44,174.46) 1332.64,210.66 ; 1338.29,205.02 ccw(c1370.08,236.81) 1370.08,191.85 cw(c1370.08,236.81) 1338.29,205.02 ; 1345.41,197.9 cw(c1317.18,169.68) 1356.08,160.71 ccw(c1317.18,169.68) 1345.41,197.9
  Bottom Layer w10: v1(27.56,375) P6.3@38.39,375 ; v1(28.54,345.47) 29.53,346.46 v1(66.93,346.46) v1(96.46,346.46) P6.3@93.5,349.41 ; P6.3@59.06,354.33 P6.3@38.39,375 ; P6.3@93.56,372.13 cw(c93.71,355.39) P6.3@108.2,363.76 ; P6.3@95.54,360.04 cw(c112.1,364.47) P6.3@98.22,374.53 ; P6.3@96.46,354.33 225.39,354.33 291.34,420.28 291.34,588.58 356.3,653.54 383.86,653.54 443.65,713.33 443.65,1051.9 581.69,1189.95 v1(581.69,1867.13) ; P6.3@99.46,351.45 ccw(c107.91,365.53) P6.3@116.12,351.31 ; P6.3@38.39,375 57.09,375 v1(58.07,375.98) 60.04,377.95 v1(93.5,377.95) P6.3@93.5,349.41 ; P6.3@41.63,375 ccw(c41.63,392.43) 53.95,380.1 cw(c41.63,392.43) P6.3@41.63,375 ; P6.3@41.63,375 cw(c41.63,389.07) 31.68,379.12 ccw(c41.63,389.07) P6.3@41.63,375 ; P6.3@41.63,375 ccw(c41.63,360.93) 31.68,370.88 cw(c41.63,360.93) P6.3@41.63,375 ; P6.3@52.86,346.46 cw(c52.86,332.39) 62.81,342.34 ccw(c52.86,332.39) P6.3@52.86,346.46 ; P6.3@52.86,346.46 ccw(c52.86,360.52) 62.81,350.58 cw(c52.86,360.52) P6.3@52.86,346.46 ; P6.3@56.98,356.4 cw(c47.04,346.46) 61.1,346.46 ccw(c47.04,346.46) P6.3@56.98,356.4 ; P6.3@56.98,356.4 ccw(c66.93,366.35) 66.93,352.28 cw(c66.93,366.35) P6.3@56.98,356.4 ; P6.3@79.44,377.95 cw(c79.44,363.89) P6.3@89.38,373.83 ; P6.3@79.44,377.95 ccw(c79.44,392.02) 89.38,382.07 cw(c79.44,392.02) P6.3@79.44,377.95 ; P6.3@79.44,377.95 cw(c79.44,363.89) P6.3@89.38,373.83 ; P6.3@81,346.46 cw(c81,360.52) 71.05,350.58 ccw(c81,360.52) P6.3@81,346.46 ; P6.3@81,346.46 ccw(c81,332.39) 71.05,342.34 cw(c81,332.39) P6.3@81,346.46 ; P6.3@82.39,346.46 cw(c82.39,332.39) 92.34,342.34 ccw(c82.39,332.39) P6.3@82.39,346.46 ; P6.3@82.39,346.46 ccw(c82.39,360.52) 92.34,350.58 cw(c82.39,360.52) P6.3@82.39,346.46 ; P6.3@89.38,373.83 cw(c79.44,363.89) P6.3@93.5,363.89 ; P6.3@89.38,373.83 cw(c79.44,363.89) P6.3@93.5,363.89 ; P6.3@93.51,349.41 cw(c105.39,337.52) 105.39,354.33 ccw(c105.39,337.52) P6.3@93.51,349.41 ; P6.3@93.5,363.89 cw(c107.57,363.89) 97.62,373.83 ccw(c107.57,363.89) P6.3@93.5,363.89 ; P6.3@94.62,372.23 cw(c101.17,338.68) 120.26,367.04 ; P6.3@94.62,372.23 cw(c101.17,338.68) 120.26,367.04 ; P6.3@94.62,372.23 cw(c101.17,338.68) 120.26,367.04 ; P6.3@99.13,379.46 ccw(c126.9,386.9) P6.3@112.53,362.01 ; P6.3@99.13,379.46 ccw(c126.9,386.9) P6.3@112.53,362.01 ; P6.3@99.13,379.46 ccw(c126.9,386.9) P6.3@112.53,362.01 ; P6.3@99.94,351.13 ccw(c109.99,364.64) 118.41,350.06 ; P6.3@99.94,351.13 ccw(c109.99,364.64) 118.41,350.06 ; P6.3@99.94,351.13 ccw(c109.99,364.64) 118.41,350.06 ; 161.72,354.33 cw(c161.72,437.31) 103.04,378.63 ccw(c161.72,437.31) 161.72,354.33 ; 161.72,354.33 ccw(c161.72,271.35) 103.04,330.03 cw(c161.72,271.35) 161.72,354.33 ; 581.69,1853.06 cw(c595.76,1853.06) 585.81,1863.01 ccw(c595.76,1853.06) 581.69,1853.06 ; 581.69,1853.06 ccw(c567.63,1853.06) 577.57,1863.01 cw(c567.63,1853.06) 581.69,1853.06 ; P6.3@27.56,369.17 cw(c27.56,328.97) 55.99,357.4 ccw(c27.56,328.97) P6.3@27.56,369.17 ; P6.3@27.56,379.17 cw(c27.56,363.11) 38.92,374.47 ccw(c27.56,363.11) P6.3@27.56,379.17 ; P6.3@32.66,341.35 cw(c44.99,329.03) 44.99,346.46 ccw(c44.99,329.03) P6.3@32.66,341.35 ; P6.3@32.66,349.59 ccw(c40.23,357.16) 40.23,346.46 cw(c40.23,357.16) P6.3@32.66,349.59 ; P6.3@46.38,375 cw(c46.38,364.29) 53.95,371.86 ccw(c46.38,364.29) P6.3@46.38,375 ; P6.3@62.19,371.86 cw(c76.89,357.16) 76.89,377.95 ccw(c76.89,357.16) P6.3@62.19,371.86 ; P6.3@93.5,367.65 ccw(c117.65,367.65) 100.58,350.58 cw(c117.65,367.65) P6.3@93.5,367.65 ; P6.3@95.97,337.1 cw(c137.57,295.5) 137.57,354.33 ccw(c137.57,295.5) P6.3@95.97,337.1 ; P6.3@95.97,371.56 ccw(c137.58,413.17) 137.58,354.33 cw(c137.58,413.17) P6.3@95.97,371.56 ; P6.3@100.58,342.34 cw(c129.53,313.38) 129.53,354.33 ccw(c129.53,313.38) P6.3@100.58,342.34
KEY-B7: K4.1 U2.30 | length 2279.3
  Top Layer w10: v1(524.61,1893.7) 524.61,1895.67 525.59,1896.65 528.54,1893.7 573.82,1893.7 587.6,1907.48 U2.30@641.73,1907.48 ; 538.67,1893.7 cw(c538.67,1907.77) 528.73,1897.82 ccw(c538.67,1907.77) 538.67,1893.7 ; 538.67,1893.7 ccw(c538.67,1879.63) 528.73,1889.58 cw(c538.67,1879.63) 538.67,1893.7
  Bottom Layer w10: K4.1@305.12,1062.99 409.48,1062.99 537.4,1190.91 537.4,1880.91 v1(524.61,1893.7) ; 363.95,1062.99 cw(c363.95,1121.83) 322.35,1080.22 ccw(c363.95,1121.83) 363.95,1062.99 ; 363.95,1062.99 ccw(c363.95,1004.16) 322.35,1045.76 cw(c363.95,1004.16) 363.95,1062.99 ; 388.09,1062.99 cw(c388.09,1145.97) 329.42,1087.3 ccw(c388.09,1145.97) 388.09,1062.99 ; 388.1,1062.99 ccw(c388.1,980.01) 329.42,1038.69 cw(c388.1,980.01) 388.1,1062.99 ; 534.55,1883.75 cw(c544.5,1893.7) 530.43,1893.7 ccw(c544.5,1893.7) 534.55,1883.75 ; 534.55,1883.75 ccw(c524.61,1873.81) 524.61,1887.87 cw(c524.61,1873.81) 534.55,1883.75
  Bottom Layer w30: K4.1@49.21,1062.99 K4.1@305.12,1062.99 ; 108.05,1062.99 cw(c108.05,1121.83) 66.44,1080.22 ccw(c108.05,1121.83) 108.05,1062.99 ; 108.05,1062.99 ccw(c108.05,1004.16) 66.44,1045.76 cw(c108.05,1004.16) 108.05,1062.99 ; 246.28,1062.99 cw(c246.28,1004.16) 287.89,1045.76 ccw(c246.28,1004.16) 246.28,1062.99 ; 246.28,1062.99 ccw(c246.28,1121.83) 287.89,1080.22 cw(c246.28,1121.83) 246.28,1062.99
KEY-B8: K3.1 U2.29 | length 2624.2
  Top Layer w10: v1(559.06,1925.2) 561.02,1927.17 U2.29@641.73,1927.17 ; v1@563.18,1921.08 cw(c577.88,1906.38) 577.88,1927.17 ccw(c577.88,1906.38) v1@563.18,1921.08
  Bottom Layer w10: K3.1@305.12,688.98 392.72,688.98 425.2,721.46 425.2,1056.08 559.06,1189.94 v1(559.06,1925.2) ; 363.95,688.98 cw(c363.95,747.81) 322.35,706.21 ccw(c363.95,747.81) 363.95,688.98 ; 363.95,688.98 ccw(c363.95,630.14) 322.35,671.74 cw(c363.95,630.14) 363.95,688.98 ; 388.09,688.98 cw(c388.09,771.95) 329.42,713.28 ccw(c388.09,771.95) 388.09,688.98 ; 388.1,688.98 ccw(c388.1,606) 329.42,664.67 cw(c388.1,606) 388.1,688.98 ; 559.06,1911.13 cw(c573.12,1911.13) 563.18,1921.08 ccw(c573.12,1911.13) 559.06,1911.13 ; 559.06,1911.13 ccw(c544.99,1911.13) 554.94,1921.08 cw(c544.99,1911.13) 559.06,1911.13
  Bottom Layer w30: K3.1@49.21,688.98 K3.1@305.12,688.98 ; 108.05,688.98 cw(c108.05,747.81) 66.44,706.21 ccw(c108.05,747.81) 108.05,688.98 ; 108.05,688.98 ccw(c108.05,630.14) 66.44,671.74 cw(c108.05,630.14) 108.05,688.98 ; 246.28,688.98 cw(c246.28,630.14) 287.89,671.74 ccw(c246.28,630.14) 246.28,688.98 ; 246.28,688.98 ccw(c246.28,747.81) 287.89,706.21 cw(c246.28,747.81) 246.28,688.98
KEY-P1: P3.3 U2.39 | length 2416.5
  Top Layer w10: v1(679.13,1654.53) 706.69,1654.53 734.25,1682.09 U2.39@734.25,1736.22 ; 693.2,1654.53 cw(c693.2,1668.59) 683.25,1658.65 ccw(c693.2,1668.59) 693.2,1654.53 ; 693.2,1654.53 ccw(c693.2,1640.46) 683.25,1650.41 cw(c693.2,1640.46) 693.2,1654.53
  Bottom Layer w10: P3.3@574.02,118.11 574.02,283.66 605.81,315.45 605.81,376.48 523.62,458.66 523.62,693.9 559.06,729.33 681.1,729.33 710.63,758.86 710.63,858.27 659.45,909.45 659.45,1634.84 v1(679.13,1654.53) ; 574.02,216.32 cw(c515.18,216.32) 556.78,174.71 ccw(c515.18,216.32) 574.02,216.32 ; 574.02,216.31 ccw(c632.85,216.31) 591.25,174.71 cw(c632.85,216.31) 574.02,216.31 ; 574.02,240.46 cw(c491.04,240.46) 549.71,181.78 ccw(c491.04,240.46) 574.02,240.46 ; 574.02,240.45 ccw(c656.99,240.45) 598.32,181.78 cw(c656.99,240.45) 574.02,240.45 ; 669.19,1644.58 cw(c679.13,1634.63) 679.13,1648.7 ccw(c679.13,1634.63) 669.19,1644.58 ; 669.19,1644.58 ccw(c659.24,1654.53) 673.31,1654.53 cw(c659.24,1654.53) 669.19,1644.58
KEY-P2: P3.4 U2.19 | length 2338.2
  Top Layer w10: v1@793.31,1878.94 U2.19@793.31,2059.05 ; v1@788.2,1888.96 ccw(c775.88,1901.28) 793.31,1901.28 cw(c775.88,1901.28) v1@788.2,1888.96 ; 793.31,1896.53 ccw(c804.01,1896.53) 796.44,1888.96 cw(c804.01,1896.53) 793.31,1896.53
  Bottom Layer w10: v1(647.64,162.4) 647.64,186.02 674.02,212.4 674.02,358.46 551.18,481.3 551.18,680.12 584.39,713.33 687.73,713.33 739.17,764.77 739.17,863.19 685.04,917.32 685.04,1185.04 805.12,1305.12 805.12,1357.45 805.29,1357.62 805.29,1469.31 761.81,1512.8 761.81,1854.33 v1(792.32,1884.84) ; 647.64,176.47 cw(c633.57,176.47) 643.52,166.52 ccw(c633.57,176.47) 647.64,176.47 ; 647.64,176.47 ccw(c661.7,176.47) 651.76,166.52 cw(c661.7,176.47) 647.64,176.47 ; 782.38,1874.9 cw(c792.32,1864.95) 792.32,1879.02 ccw(c792.32,1864.95) 782.38,1874.9 ; 782.38,1874.9 ccw(c772.43,1884.84) 786.5,1884.84 cw(c772.43,1884.84) 782.38,1874.9
KEY-P3: P5.1 U2.41 | length 1888.6
  Top Layer w10: U2.41@773.62,1736.22 773.62,1642.72 789.37,1626.97 v1(789.37,1625.98) ; 778.73,1637.61 cw(c767.1,1625.98) 783.54,1625.98 ccw(c767.1,1625.98) 778.73,1637.61 ; 781.1,1635.24 ccw(c789.37,1643.5) 789.37,1631.81 cw(c789.37,1643.5) 781.1,1635.24
  Bottom Layer w10: v1(789.37,1625.98) 789.37,1576.52 821.6,1544.29 821.6,1298.97 707.68,1185.05 707.68,923.23 757.87,873.03 757.87,735.24 786.9,706.21 786.9,672.77 970.08,489.59 970.08,238.58 1000,208.66 v1(1000,168.31) ; 789.37,1611.92 cw(c803.44,1611.92) 793.49,1621.86 ccw(c803.44,1611.92) 789.37,1611.92 ; 789.37,1611.92 ccw(c775.3,1611.92) 785.25,1621.86 cw(c775.3,1611.92) 789.37,1611.92 ; 1000,182.37 cw(c985.93,182.37) 995.88,172.43 ccw(c985.93,182.37) 1000,182.37 ; 1000,182.37 ccw(c1014.07,182.37) 1004.12,172.43 cw(c1014.07,182.37) 1000,182.37
KEY-P4: P5.2 U2.42 | length 2239.5
  Top Layer w10: U2.42@793.31,1736.22 793.31,1672.24 825.79,1639.76 v1(825.79,1612.2) ; 825.79,1626.27 cw(c811.72,1626.27) 821.67,1616.32 ccw(c811.72,1626.27) 825.79,1626.27 ; 825.79,1626.27 ccw(c839.85,1626.27) 829.91,1616.32 cw(c839.85,1626.27) 825.79,1626.27
  Bottom Layer w10: v1(825.79,1612.2) 825.79,1564.96 837.6,1553.15 837.6,1292.34 727.36,1182.11 727.36,936.03 786.42,876.98 786.42,729.32 802.9,712.84 802.9,679.4 962.53,519.76 963.51,519.76 1001.97,481.31 1001.97,294.29 1070.08,226.18 ; P5.2@1070.08,118.11 1070.08,226.18 ; 825.79,1598.14 cw(c839.85,1598.14) 829.91,1608.08 ccw(c839.85,1598.14) 825.79,1598.14 ; 825.79,1598.14 ccw(c811.72,1598.14) 821.67,1608.08 cw(c811.72,1598.14) 825.79,1598.14 ; 1070.08,206.19 cw(c1033.58,206.19) 1055.47,176.98 ccw(c1033.58,206.19) 1070.08,206.19 ; 1070.08,206.19 ccw(c1106.57,206.19) 1084.69,176.98 cw(c1106.57,206.19) 1070.08,206.19 ; 1070.08,226.18 cw(c1018.61,226.18) 1049.47,184.99 ccw(c1018.61,226.18) 1070.08,226.18 ; 1070.08,226.18 ccw(c1121.55,226.18) 1090.69,184.99 cw(c1121.55,226.18) 1070.08,226.18
KEY-P5: P5.3 U2.43 | length 2438.2
  Top Layer w10: U2.43@812.99,1736.22 812.99,1687.01 857.28,1642.72 857.28,1571.85 v1(856.3,1570.87) ; v1@852.18,1574.99 ccw(c839.86,1587.31) 857.28,1587.31 cw(c839.86,1587.31) v1@852.18,1574.99 ; 857.28,1582.56 ccw(c867.99,1582.56) 860.42,1574.99 cw(c867.99,1582.56) 857.28,1582.56
  Bottom Layer w10: v1(856.3,1570.87) 856.3,1284.45 746.06,1174.21 746.06,939.96 818.9,867.13 818.9,686.02 969.16,535.76 970.14,535.76 1024.61,481.3 1024.61,316.93 1073.82,267.72 1151.57,267.72 1170.08,249.21 P5.3@1170.08,118.11 ; 856.3,1556.8 cw(c870.37,1556.8) 860.42,1566.75 ccw(c870.37,1556.8) 856.3,1556.8 ; 856.3,1556.8 ccw(c842.23,1556.8) 852.18,1566.75 cw(c842.23,1556.8) 856.3,1556.8 ; 1170.08,216.31 cw(c1111.24,216.31) 1152.85,174.71 ccw(c1111.24,216.31) 1170.08,216.31 ; 1170.08,216.32 ccw(c1228.91,216.32) 1187.31,174.71 cw(c1228.91,216.32) 1170.08,216.32 ; 1170.08,240.46 cw(c1087.1,240.46) 1145.78,181.78 ccw(c1087.1,240.46) 1170.08,240.46 ; 1170.08,240.46 ccw(c1253.06,240.46) 1194.38,181.78 cw(c1253.06,240.46) 1170.08,240.46
KEY-P6: P5.4 U2.2 | length 2552.6
  Top Layer w10: v1@914.37,1809.06 U2.2@975.39,1809.06 ; 931.39,1809.06 cw(c931.39,1823.12) 921.44,1813.18 ccw(c931.39,1823.12) 931.39,1809.06 ; 931.39,1809.06 ccw(c931.39,1794.98) 921.44,1804.93 cw(c931.39,1794.98) 931.39,1809.06
  Bottom Layer w10: v1(917.32,1809.06) 917.32,1799.21 903.54,1785.43 ; P5.4@1270.08,118.11 1270.08,253.54 1230.32,293.31 1090.55,293.31 1047.24,336.61 1047.24,551.18 877.95,720.47 877.95,1498.03 903.54,1523.62 903.54,1785.43 ; 903.54,1785.43 ccw(c883.81,1805.17) 911.53,1808.38 cw(c883.81,1805.17) 903.54,1785.43 ; 1270.08,216.31 cw(c1211.24,216.31) 1252.85,174.71 ccw(c1211.24,216.31) 1270.08,216.31 ; 1270.08,216.32 ccw(c1328.91,216.32) 1287.31,174.71 cw(c1328.91,216.32) 1270.08,216.32 ; 1270.08,240.46 cw(c1187.1,240.46) 1245.78,181.78 ccw(c1187.1,240.46) 1270.08,240.46 ; 1270.08,240.46 ccw(c1353.06,240.46) 1294.38,181.78 cw(c1353.06,240.46) 1270.08,240.46
NetC2_1: C2.1 C13.1 P2.1 R2.2 R3.2 U1.4 U1.8 | length 1486
  Top Layer w20: R2.2@880.91,768.21 876.97,772.15 876.97,909.45 862.2,924.21 781.5,924.21 737.2,879.92 622.05,879.92 600.39,858.27 600.39,770.67 559.64,729.92 U1.4@489.17,729.92 489.17,716.54 516.73,688.98 ; 516.73,688.98 cw(c543.02,715.27) 508.57,729.24 ccw(c543.02,715.27) 516.73,688.98 ; U1.4@490.03,736.76 ccw(c512.66,727.58) 495.4,710.31 cw(c512.66,727.58) U1.4@490.03,736.76 ; U1.8@748.7,879.92 cw(c776.45,879.92) 756.83,899.55 ccw(c776.45,879.92) U1.8@748.7,879.92 ; 876.97,789.79 ccw(c902.48,789.79) 884.44,771.74 cw(c902.48,789.79) 876.97,789.79
  Top Layer w80: P2.1@454.72,348.43 454.72,532.48 504.43,582.19 ; 489.17,707.68 489.17,597.44 504.43,582.19 ; 516.73,688.98 563.98,641.73 504.43,582.19
NetD1_2: D1.2 R11.1 | length 810
  Top Layer w8: v1(1255.91,3175.2) 1295.27,3175.2 R11.1@1299.21,3179.13 ; v1@1259.32,3181.11 ccw(c1270.76,3200.93) 1276.68,3178.82 ; v1@1259.32,3181.11 ccw(c1270.76,3200.93) 1276.68,3178.82 ; v1@1259.32,3181.11 ccw(c1270.76,3200.93) 1276.68,3178.82 ; v1@1261.82,3171.78 cw(c1270.55,3166.74) 1267.94,3176.48 ; v1@1261.82,3171.78 cw(c1270.55,3166.74) 1267.94,3176.48 ; v1@1261.82,3171.78 cw(c1270.55,3166.74) 1267.94,3176.48 ; 1272.39,3175.2 cw(c1272.39,3191.68) 1260.73,3180.02 ccw(c1272.39,3191.68) 1272.39,3175.2 ; 1272.39,3175.2 ccw(c1272.39,3158.72) 1260.73,3170.37 cw(c1272.39,3158.72) 1272.39,3175.2 ; v1@1263.15,3175.2 ccw(c1263.15,3215.19) 1291.43,3186.91 cw(c1263.15,3215.19) v1@1263.15,3175.2 ; 1282.16,3175.2 cw(c1282.16,3162.08) 1291.43,3171.36 ccw(c1282.16,3162.08) 1282.16,3175.2 ; 1282.47,3175.2 ccw(c1282.47,3195.88) 1297.09,3181.26 cw(c1282.47,3195.88) 1282.47,3175.2
  Bottom Layer w8: v1@1254.89,3175.78 cw(c1271.93,3165.94) 1266.84,3184.95 ; v1(1255.91,3175.2) 1270.67,3175.2 ; v1@1260.46,3180.28 ccw(c1267.63,3188.3) 1270.41,3177.91 ; 1269.48,3177.66 ccw(c1272.74,3165.48) 1261.82,3171.78 cw(c1295.59,3152.29) 1285.5,3189.95 ; D1.2@1297.24,3324.8 1297.24,3285.43 ; 1270.67,3175.2 cw(c1270.67,3187.75) 1261.11,3179.62 ccw(c1270.67,3187.75) 1270.67,3175.2 ; 1270.67,3175.2 ccw(c1270.67,3162.65) 1261.11,3170.78 cw(c1270.67,3162.65) 1270.67,3175.2 ; 1270.67,3175.2 1297.24,3201.77 1297.24,3285.43 ; 1297.24,3285.43 cw(c1326.16,3285.43) 1307.55,3307.56 ccw(c1326.16,3285.43) 1297.24,3285.43 ; 1297.24,3285.43 ccw(c1268.32,3285.43) 1286.94,3307.56 cw(c1268.32,3285.43) 1297.24,3285.43 ; v1@1255.91,3174.02 ccw(c1255.91,3206.83) 1279.11,3183.63 cw(c1255.91,3206.83) v1@1255.91,3174.02 ; v1@1255.91,3182.02 ccw(c1255.91,3234.15) 1292.76,3197.29 cw(c1255.91,3234.15) v1@1255.91,3182.02
NetD2_2: D2.2 R12.1 | length 753.4
  Top Layer w8: R12.1@276.57,3184.06 290.35,3170.28 v1(319.88,3170.28) ; R12.1@278.58,3181.82 cw(c286.27,3173.26) 294.35,3181.46 ; R12.1@283.93,3175.87 cw(c291.97,3166.92) 300.41,3175.5 ; 303.4,3170.28 cw(c303.4,3153.79) 315.05,3165.45 ccw(c303.4,3153.79) 303.4,3170.28 ; 303.4,3170.28 ccw(c303.4,3186.76) 315.05,3175.1 cw(c303.4,3186.76) 303.4,3170.28 ; 303.96,3174.54 cw(c299.7,3158.62) v1@313.97,3166.86 ; 303.96,3174.54 ccw(c308.23,3190.46) v1@316.47,3176.19 ; 303.96,3174.54 cw(c299.7,3158.62) v1@313.97,3166.86 ; 303.96,3174.54 ccw(c308.23,3190.46) v1@316.47,3176.19 ; 303.96,3174.54 cw(c299.7,3158.62) v1@313.97,3166.86 ; 303.96,3174.54 ccw(c308.23,3190.46) v1@316.47,3176.19 ; v1(319.88,3170.28) cw(c319.88,3209.51) 286.06,3189.63 ccw(c319.88,3209.51) v1(319.88,3170.28) ; R12.1@272.26,3181.52 ccw(c291.92,3193.07) 291.92,3170.28 cw(c291.92,3193.07) R12.1@272.26,3181.52 ; R12.1@279.16,3185.58 ccw(c305.9,3201.29) 305.9,3170.28 cw(c305.9,3201.29) R12.1@279.16,3185.58
  Bottom Layer w8: D2.2@275.59,3324.8 275.59,3214.57 v1(319.88,3170.28) ; 308.23,3181.93 cw(c296.57,3170.28) 313.06,3170.28 ccw(c296.57,3170.28) 308.23,3181.93 ; 308.23,3181.93 ccw(c319.88,3193.58) 319.88,3177.1 cw(c319.88,3193.58) 308.23,3181.93 ; D2.2@264.28,3308.49 cw(c236.96,3281.18) 275.59,3281.18 ccw(c236.96,3281.18) D2.2@264.28,3308.49 ; 275.59,3281.18 cw(c314.22,3281.18) 286.9,3308.49 ccw(c314.22,3281.18) 275.59,3281.18
NetP8_2: P8.2 Q1.3 | length 1154
  Top Layer w30: P8.2@1036.42,1397.64 1085.63,1348.42 Q1.3@1216.54,1348.43 ; P8.2@1061.04,1355.05 cw(c1082.41,1332.82) 1099.12,1358.74 cw(c1130.71,1407.75) P8.2@1073.64,1395.82 ; 1085.63,1348.43 cw(c1113.83,1376.63) 1074.24,1381.47 ccw(c1113.83,1376.63) 1085.63,1348.43 ; 1085.63,1348.43 ccw(c1069.37,1332.16) 1056.04,1350.91 cw(c1069.37,1332.16) 1085.63,1348.43 ; Q1.3@1216.54,1348.43 cw(c1216.53,1555.44) 1063.15,1416.4 ccw(c1216.53,1555.44) Q1.3@1216.54,1348.43 ; P8.2@1018.7,1376.1 ccw(c1081.15,1432.71) 1081.15,1348.42 cw(c1081.15,1432.71) P8.2@1018.7,1376.1 ; P8.2@1040.92,1396.25 ccw(c1148.84,1494.08) 1148.84,1348.42 cw(c1148.84,1494.08) P8.2@1040.92,1396.25
NetQ1_1: Q1.1 R9.1 R10.1 | length 219.7
  Top Layer w50: 1246.06,1499.02 1246.06,1456.69 1308.07,1456.69 R10.1@1323.82,1440.94 ; 1309.94,1456.69 cw(c1309.94,1427.07) R10.1@1330.89,1448.02 ; 1309.94,1456.69 cw(c1309.94,1427.07) R10.1@1330.89,1448.02 ; 1309.94,1456.69 cw(c1309.94,1427.07) R10.1@1330.89,1448.02 ; 1309.94,1456.69 cw(c1309.94,1427.07) R10.1@1330.89,1448.02
NetR2_1: R2.1 U1.6 | length 221.1
  Top Layer w10: U1.6@729.17,779.92 772.24,779.92 783.96,768.21 R2.1@817.91,768.21 ; 763.33,779.92 cw(c763.33,796.36) 751.71,784.74 ccw(c763.33,796.36) 763.33,779.92 ; 763.33,779.92 ccw(c763.33,763.48) 751.71,775.11 cw(c763.33,763.48) 763.33,779.92 ; 793.77,768.21 cw(c793.77,744.07) 810.84,761.14 ccw(c793.77,744.07) 793.77,768.21 ; 793.77,768.21 ccw(c793.77,792.35) 810.84,775.28 cw(c793.77,792.35) 793.77,768.21
NetR3_1: R3.1 U1.7 | length 229.3
  Top Layer w10: U1.7@729.17,829.92 772.83,829.92 R3.1@813.98,871.06 ; 763.33,829.92 cw(c763.33,846.36) 751.71,834.74 ccw(c763.33,846.36) 763.33,829.92 ; 763.33,829.92 ccw(c763.33,813.48) 751.71,825.11 cw(c763.33,813.48) 763.33,829.92 ; 796.91,853.99 cw(c813.98,836.92) 813.98,861.06 ccw(c813.98,836.92) 796.91,853.99 ; 796.91,853.99 ccw(c779.83,871.06) 803.98,871.06 cw(c779.83,871.06) 796.91,853.99
NetR4_2: R4.2 U1.2 | length 430.1
  Top Layer w20: U1.2@489.17,829.92 435.83,829.92 418.31,847.44 418.31,931.1 456.69,969.49 538.39,969.49 R4.2@555.12,952.76 ; 502.65,969.49 cw(c502.65,900.29) 551.58,949.22 ccw(c502.65,900.29) 502.65,969.49
NetR5_1: R5.1 U2.44 | length 357.8
  Top Layer w10: U2.44@832.68,1736.22 832.68,1692.91 890.75,1634.84 R5.1@1047.24,1634.84 ; 1023.1,1634.84 cw(c1023.1,1610.7) 1040.17,1627.77 ccw(c1023.1,1610.7) 1023.1,1634.84 ; 1023.1,1634.84 ccw(c1023.1,1658.98) 1040.17,1641.91 cw(c1023.1,1658.98) 1023.1,1634.84
NetR8_2: R8.2 U2.20 | length 322.3
  Top Layer w8: U2.20@773.62,2059.05 773.62,2092.52 820.87,2139.76 820.87,2198.82 852.36,2230.32 R8.2@852.36,2235.24 ; 830.1,2208.06 ccw(c802.92,2235.24) 841.36,2235.24 cw(c802.92,2235.24) 830.1,2208.06 ; 841.99,2219.94 cw(c852.36,2209.56) 852.36,2224.24 ccw(c852.36,2209.56) 841.99,2219.94 ; R8.2@843.76,2221.71 ccw(c830.24,2235.24) 849.36,2235.24 cw(c830.24,2235.24) R8.2@843.76,2221.71
NetR51_1: R51.1 R52.2 U3.1 | length 388.3
  Top Layer w30: U3.1@648.62,2381.89 R51.1@648.62,2278.54 598.43,2228.35 551.18,2228.35 R52.2@526.57,2203.74 ; R52.2@526.57,2203.74 cw(c585.98,2144.33) 585.98,2228.35 ccw(c585.98,2144.33) R52.2@526.57,2203.74
NetU2_5: U2.5 Y1.1 | length 314.4
  Top Layer w10: U2.5@964.57,1868.11 965.98,1866.7 1061.02,1866.7 1081.27,1846.46 ; Y1.1@1129.92,1846.46 1081.27,1846.46 ; 1081.27,1846.46 cw(c1081.27,1802.08) 1112.77,1833.34 ccw(c1081.27,1802.08) 1081.27,1846.46 ; 1081.27,1846.46 ccw(c1081.27,1890.83) 1112.77,1859.57 cw(c1081.27,1890.83) 1081.27,1846.46
NetU2_6: U2.6 Y1.3 | length 445.7
  Top Layer w10: U2.6@964.57,1887.8 1046.26,1887.8 1051.35,1882.7 1189.79,1882.7 ; Y1.3@1224.41,1917.32 1189.79,1882.7 ; 1189.79,1882.7 ccw(c1160.17,1912.32) 1201.91,1915.78 cw(c1160.17,1912.32) 1189.79,1882.7 ; 1195.4,1888.32 cw(c1220.47,1863.25) 1220.47,1898.7 ccw(c1220.47,1863.25) 1195.4,1888.32 ; Y1.3@1205.04,1897.96 ccw(c1188.34,1914.66) 1211.88,1916.61 cw(c1188.34,1914.66) Y1.3@1205.04,1897.96
RF-IRQ: U2.21 U3.7 | length 582.2
  Top Layer w8: U2.21@753.94,2059.05 753.94,2276.57 784.45,2307.09 923.23,2307.09 950.2,2334.05 U3.7@950.2,2389.57 ; U3.7@940.31,2359.8 cw(c916.46,2335.95) 950.2,2335.95 ccw(c916.46,2335.95) U3.7@940.31,2359.8 ; 950.2,2343.55 cw(c973.18,2343.55) 956.93,2359.8 ccw(c973.18,2343.55) 950.2,2343.55
RFVCC: C15.2 C17.2 C18.1 C19.1 C191.1 C192.1 R51.2 SP2.5 U3.0 | length 3653.9
  Top Layer w30: C192.1@474.41,2419.29 530.51,2419.29 ; C191.1@514.76,2269.69 C15.2@514.76,2329.72 514.76,2367.13 530.51,2382.87 ; R51.2@591.54,2272.64 598.62,2279.72 U3.0@598.62,2381.89 531.5,2381.89 530.51,2382.87 ; 1164.37,1161.42 v1(1164.37,1247.05) ; C17.2@1240.16,1161.42 1168.31,1161.42 1134.84,1127.95 C19.1@1134.84,1093.5 ; v1(1355.32,2107.28) 1295.77,2166.83 1211.12,2166.83 1145.67,2232.28 1145.67,2688.98 1127.95,2706.69 600.39,2706.69 530.51,2636.81 530.51,2419.29 ; 530.51,2382.87 530.51,2419.29 ; C19.1@1134.84,1093.5 cw(c1092.07,1050.73) 1152.56,1050.73 ccw(c1092.07,1050.73) C19.1@1134.84,1093.5 ; C19.1@1134.84,1093.5 cw(c1130.91,1072.21) 1152.56,1072.21 ccw(c1130.91,1072.21) C19.1@1134.84,1093.5 ; C19.1@1134.84,1093.5 1140.75,1093.5 1152.56,1081.69 SP2.5@1152.56,1025.59 1221.46,956.69 C18.1@1241.14,956.69 ; C18.1@1241.14,956.69 cw(c1241.14,1004.22) 1207.54,970.61 ccw(c1241.14,1004.22) C18.1@1241.14,956.69 ; R51.2@585.63,2278.54 ccw(c554.26,2309.91) 598.62,2309.91 cw(c554.26,2309.91) R51.2@585.63,2278.54
  Bottom Layer w30: v1(1164.37,1247.05) 1355.32,1437.99 v1(1355.32,2107.28)
RST: C1.1 R1.1 U2.7 | length 624.5
  Top Layer w8: U2.7@964.57,1907.48 1054.13,1907.48 1075.79,1929.13 1075.79,1997.05 1105.32,2026.57 1171.26,2026.57 1183.07,2038.39 ; R1.1@1247.05,2060.04 C1.1@1183.07,2060.04 1183.07,2038.39 ; 1183.07,2038.39 cw(c1198.88,2038.39) 1189.56,2051.16 ccw(c1198.88,2038.39) 1183.07,2038.39 ; 1183.07,2038.39 ccw(c1167.26,2038.39) 1176.58,2051.16 cw(c1167.26,2038.39) 1183.07,2038.39 ; 1220.49,2060.04 cw(c1220.49,2033.49) 1239.27,2052.26 ccw(c1220.49,2033.49) 1220.49,2060.04 ; 1220.49,2060.04 ccw(c1220.49,2086.6) 1239.27,2067.82 cw(c1220.49,2086.6) 1220.49,2060.04 ; C1.1@1190.85,2052.26 cw(c1209.63,2033.49) 1209.63,2060.04 ccw(c1209.63,2033.49) C1.1@1190.85,2052.26 ; C1.1@1190.85,2067.82 ccw(c1209.63,2086.6) 1209.63,2060.04 cw(c1209.63,2086.6) C1.1@1190.85,2067.82
SPI2-MISO: U2.27 U3.6 | length 929.8
  Top Layer w8: 577.01,2147.93 cw(c595.01,2143.18) v1@586.05,2159.49 ; v1(586.61,2158.46) 586.61,2150.81 569.66,2133.86 ; U2.27@641.73,1966.54 604.22,1966.54 569.66,2001.09 569.66,2133.86 ; 569.66,2133.86 ccw(c545.22,2158.3) 579.79,2158.44 cw(c545.22,2158.3) 569.66,2133.86 ; 583.24,2147.44 ccw(c572.28,2158.41) 587.79,2158.47 cw(c572.28,2158.41) 583.24,2147.44
  Bottom Layer w8: v1@586.61,2152.56 v1(586.61,2158.46) 589.57,2158.46 602.36,2171.26 ; U3.6@900.2,2389.57 900.2,2335.24 736.22,2171.26 602.36,2171.26 ; 602.36,2171.26 cw(c587.88,2185.74) 586.93,2165.28 ccw(c587.88,2185.74) 602.36,2171.26 ; v1@593.44,2158.46 cw(c602.79,2158.46) 596.18,2165.08 ccw(c602.79,2158.46) v1@593.44,2158.46 ; U3.6@890.31,2359.8 cw(c866.46,2335.95) 900.2,2335.95 ccw(c866.46,2335.95) U3.6@890.31,2359.8 ; 900.2,2343.55 cw(c923.18,2343.55) 906.93,2359.8 ccw(c923.18,2343.55) 900.2,2343.55